# Altium PCB Telemetry_CurrentSense.PcbDoc
Units mm, origin at the board's own origin, x right, y up, seen from the top; angles counter-clockwise.
Board outline 18 x 39 mm, 2 copper layers (Top Layer, Bottom Layer); 5 components, 5 nets, 17 pads, 0 vias.
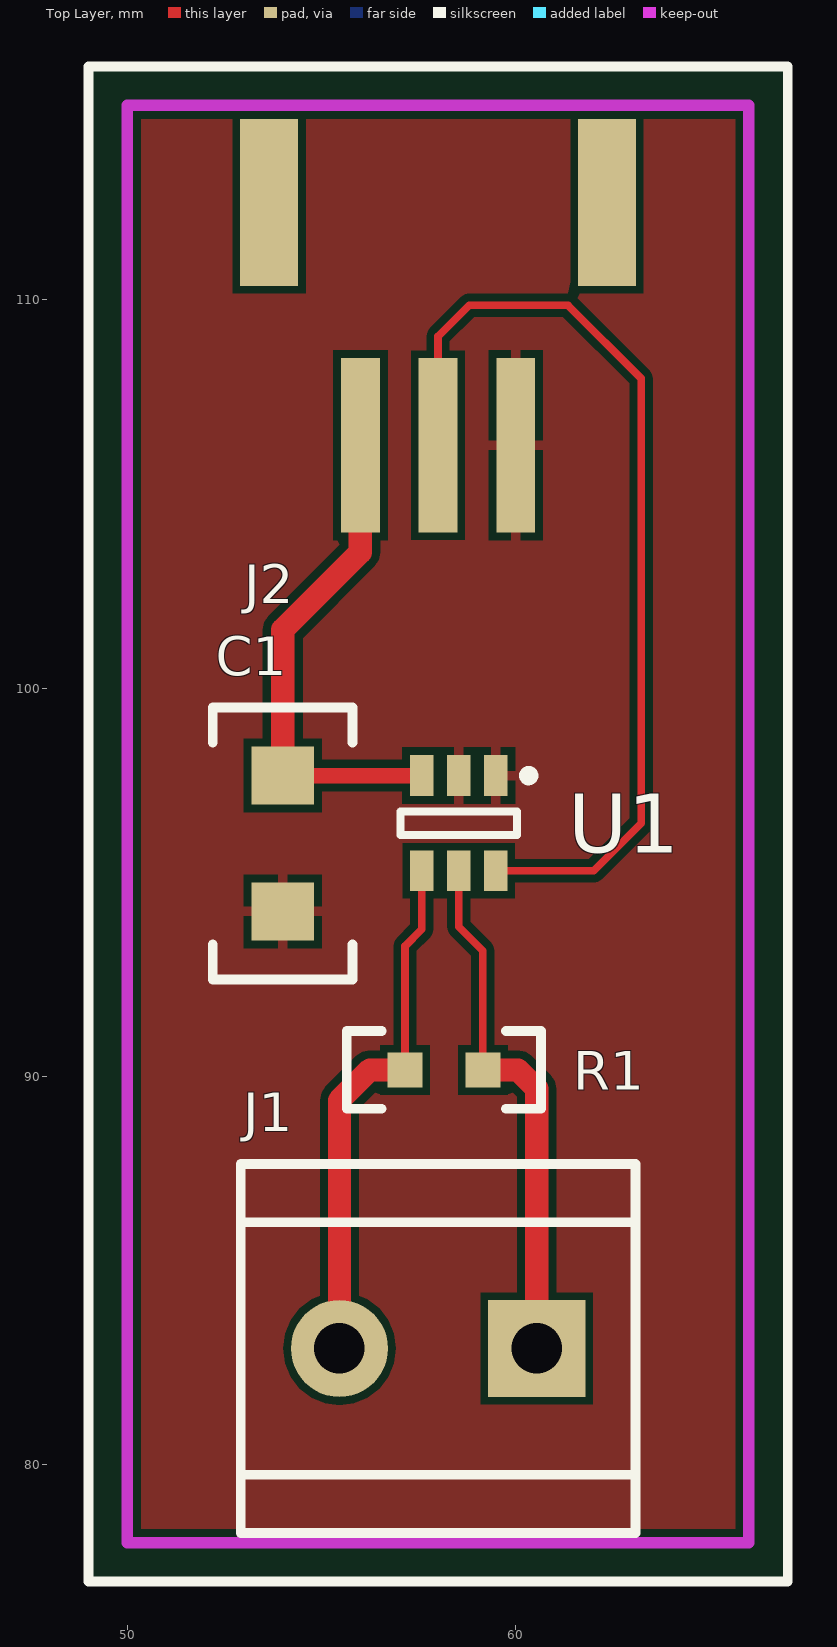
[diagram p0: Top Layer view]
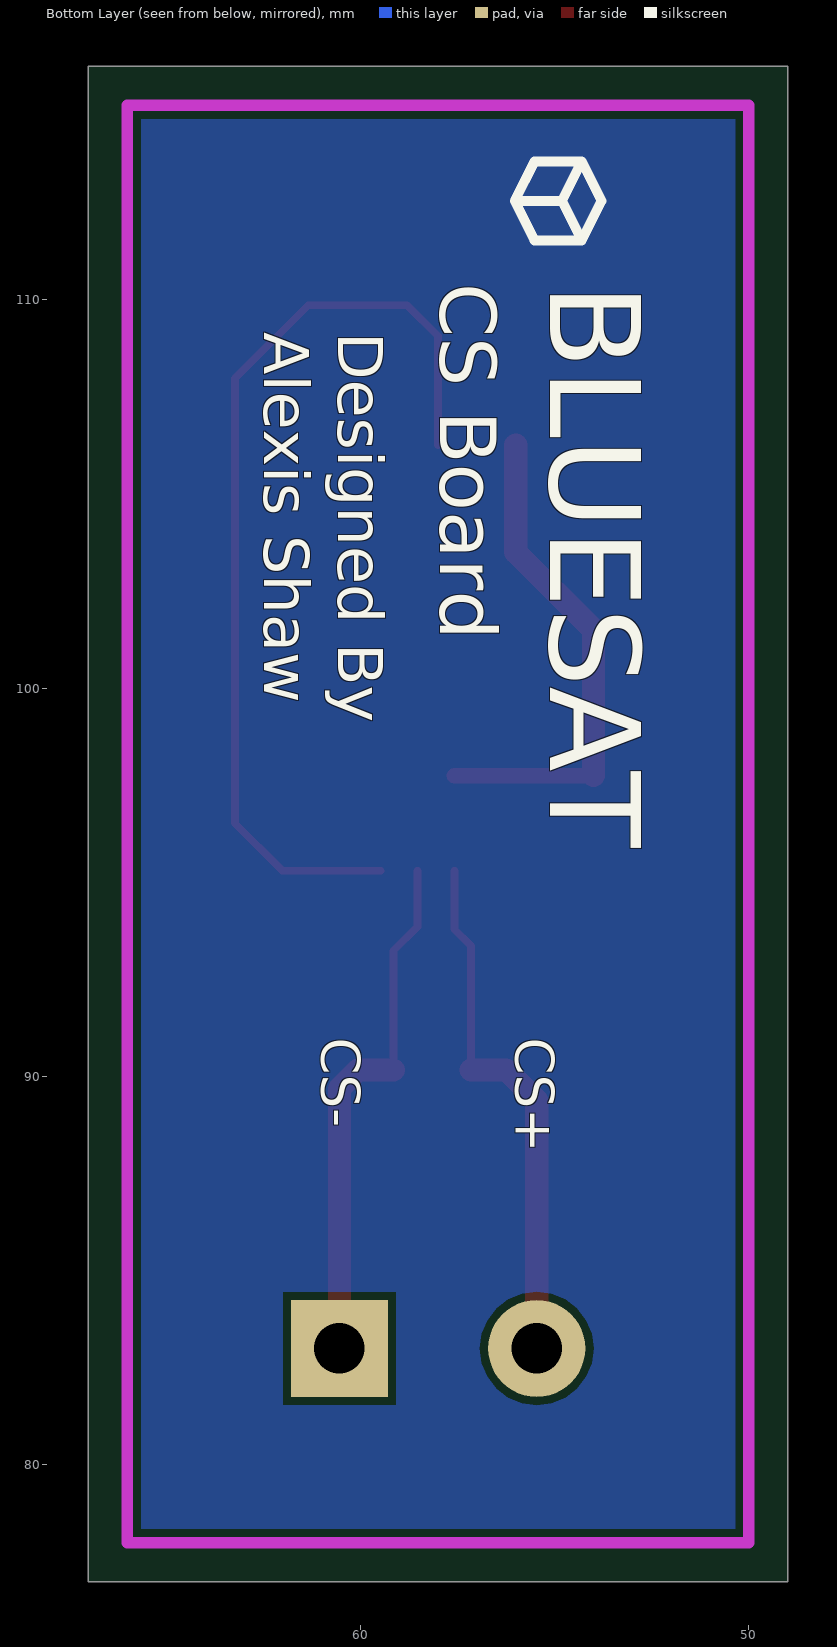
[diagram p1: Bottom Layer view, seen from below]

## Layer stack, top to bottom
Top Layer: signal copper 0.0356
Dielectric: dielectric 0.32, FR-4, Dk 4.8
Bottom Layer: signal copper 0.0356

## Board outline
49,77 67,77 67,116 49,116

## Design rules (kind name [scope] priority, off if disabled: settings)
Clearance [All] p1: gap=0.2
PolygonConnect [All] p1: connectstyle=Relief reliefconductorwidth=0.254 reliefentries=4 polygonreliefangle="90 Angle"
RoomDefinition TELM0004_CurrentSense [InComponentClass('TELM0004_CurrentSense')] p1: confinementstyle=ConfineIn formatcopy=TRUE lockcomponents=FALSE outline 49,77 67,77 67,116 49,116
RoutingVias [All] p1: holewidth=0.3 width=0.7 viastyle="Through Hole" minholewidth=0.711 minwidth=1.27 maxholewidth=0.711 maxwidth=1.27
SilkscreenOverComponentPads [All] p1: minsilkscreentomaskgap=0.254
SolderMaskExpansion [All] p1: expansion=0.102
Width [All] p1: maxlimit=0.6 minlimit=0.2 preferedwidth=0.2
27 further rules are at their usual default settings.

## Components (designator, comment, footprint, x,y, rotation, side; value= is the part's Value field where it differs from the comment)
C1 "1206 Cap" "1206 Cap" 54,96 r270 top
J1 "2 Pin terminal Block" "5.05mm Terminal Block - 2" 58,83 r180 top (schematic designator U1)
J2 "S3B-PH-SM4-TB" S3B-PH-SM4-TB 58,114 r180 top (schematic designator J1)
R1 "0603 Resistor" "0603 Resistor" 58.15,90.17 r180 top
U1 "ADM4073" SOT95P285X145-6N 58.531,96.52 r270 top

## Footprints (in the part's own frame and the unit in brackets; to place one, negate y for a bottom-side part, rotate by r counter-clockwise, add the part's x,y. Pads: shape width x height; smd on the part's side, far side on the other; paste and mask are expansions set on the pad)
"5.05mm Terminal Block - 2" [mm] "SOT23, 6-Leads, Body 3.0x3.0mm (max), Pitch 0.95mm, IPC Medium Density"
  rect 2.5x2.5 hole 1.3: 1(-2.54,0)
  round 2.5 hole 1.3: 2(2.54,0)
  silkscreen extent -5.08,-4.75 5.08,4.75
"0603 Resistor" [mm] "0603 Resistor"
  rect 0.9x0.9 smd: 1(1,0) 2(-1,0)
  silkscreen extent -2.5,-1 2.5,1, body extent -0.8,-0.43 0.8,0.43, height 0.55
"1206 Cap" [mm] "1206 Capacitor"
  rect 1.5x1.6 smd: 1(1.75,0) 2(-1.75,0)
  silkscreen extent -3.5,-1.8 3.5,1.8, body extent -1.6,-0.8 1.6,0.8, height 1.8
S3B-PH-SM4-TB [mm]
  rect 1x4.5 smd: 1(-2,7.75) 2(0,7.75) 3(2,7.75)
  rect 1.5x4.3 smd: MECH(-4.35,1.5) MECH(4.35,1.5)
  body extent -4.95,0.2 4.95,8.8, height 5.5
SOT95P285X145-6N [mm] "SOT23, 6-Leads, Body 3.0x3.0mm (max), Pitch 0.95mm, IPC Medium Density"
  rect 1.05x0.6 smd: 1(-1.225,0.95) 2(-1.225,0) 3(-1.225,-0.95) 4(1.225,-0.95) 5(1.225,0) 6(1.225,0.95)
  silkscreen extent -1.35,-1.5 0.3,1.93, body extent -0.85,-1.5 0.85,1.5, height 1.45

## Part data
C1: library part "1206 MLCC - X7R, 10%", "1206 MLCC - X7R, 10%"
J1: library part "2 Terminal Block"
J2: "JST connector"
R1: library part "0603 Thin Film Resistor 0.1%", "0603 Thin Film Resistor 0.1%"
U1: "Current Sense Amplifer"

## Nets (pads, with @x,y where several pads share a name; then routed paths per layer and width w, separated by ;. In a path a pad name is that pad's centre, name@x,y a point inside that pad or via, vN(x,y) a via of type N, cw(c..) or ccw(c..) an arc to the next point about the centre after c; other vN are vias at no path point)
5V0: C1.2 J2.3 U1.3 | length 12.9
  Top Layer w0.2: C1.2 C1.2@54.005,97.745
  Top Layer w0.4: C1.2@54.005,97.745 U1.3
  Top Layer w0.6: C1.2 54,101.498 56,103.498 J2.3
GND: C1.1 J2.1 U1.1 U1.2
NetJ1_1: J1.1 R1.2 U1.5 | length 13.7
  Top Layer w0.2: U1.5 58.531,93.853 59.15,93.234 R1.2
  Top Layer w0.6: R1.2 60.055,90.17 60.54,89.685 J1.1
NetJ1_2: J1.2 R1.1 U1.4 | length 13.7
  Top Layer w0.2: R1.1 57.15,93.361 57.581,93.792 U1.4
  Top Layer w0.6: J1.2 55.46,89.385 56.245,90.17 R1.1
NetJ2_2: J2.2 U1.6 | length 24.9
  Top Layer w0.2: J2.2 58,109.054 58.801,109.855 61.341,109.855 63.23,107.966 63.23,96.52 62.005,95.295 U1.6
pads on no net: J2.MECH

## Polygon pours and split planes (outlines as drawn)
GND on Top Layer "Bottom Layer-No Net" (solid, pour order 6): 50,115 66,115 66,78 50,78
no net on Bottom Layer "Bottom Layer-No Net" (solid, pour order 8): 50,115 66,115 66,78 50,78

## Keep-outs
Keep-Out Layer:
  lines w0.3: 50,78 66,78 66,115 50,115 50,78

## Silkscreen, mask and mechanical layers (free items; w line width, h text height)
Top Overlay:
  the board outline again, w0.254
Bottom Overlay:
  lines w0.254: 54.302,111.524 55.52,111.524 56.028,112.54 ; 54.302,111.524 54.81,112.54 ; 54.302,111.524 53.794,112.54 54.302,113.556 ; 54.302,113.556 55.52,113.556 56.028,112.54 ; 54.302,113.556 54.81,112.54 ; 54.81,112.54 56.028,112.54
  text "BLUESAT" at 55.88,110.425 h4 r90
  text "CS Board" at 58.42,110.425 h2.49 r90
  text "Designed By" at 60.96,109.155 h2 r90
  text "Alexis Shaw" at 62.865,109.155 h2 r90
  text "CS+" at 56,91 h1 r90
  text "CS-" at 61,91 h1 r90
Drill Drawing:
  text ".LEGEND" at 74.881,67.89 h1.52
  text "Drill Drawing." at 74.881,65.35 h1.52

## Dimensions
50,78 to 66,78 on Mechanical 1
50,78 to 50,115 on Mechanical 1